# EAGLE board TouScruino-v3 (EAGLE 6.3)

Size 63.5 x 78.74 mm. Coordinates in mm from the lower left corner, seen from the top.
Outline: 63.5,1.27 63.5,6.35 62.23,7.62 58.67,7.62 58.67,60.96 62.23,60.96 63.5,62.23 63.5,67.31 62.23,68.58 58.42,68.58 58.42,78.74 5.08,78.74 5.08,68.58 1.27,68.58 0,67.31 0,62.23 1.27,60.96 5.08,60.96 5.08,7.62 1.27,7.62 0,6.35 0,1.27 1.27,0 62.23,0 63.5,1.27
Copper layers (1*16): Top 0.035mm / dielectric 1.5mm / Bottom 0.035mm
Design rules "default": minimum track width 10mil, minimum drill 24mil, track to track 8mil, track to pad 8mil, pad to pad 8mil, via to via 8mil, smd to smd 8mil, copper to edge 40mil, drill to drill 8mil, minimum pad ring 10mil, minimum via ring 8mil, stop-mask expansion 4mil, vias tented up to drill 0mil, thermal gap 10mil
Net classes: 0 default: width 0.203 mm; 1 vcc: width 0.254 mm
Holes 3.2 mm at 2.54,64.77 60.96,64.77 2.54,3.81 60.96,3.81

## Footprints (pad centres in the part's own frame; a part is rotated, then mirrored left to right if it is on the bottom)
0805 = smd 0.8 x 1.2: 1 -0.9,0; 2 0.9,0
0603-CAP = smd 1.1 x 1: 1 -0.85,0; 2 0.85,0
EIA3216 = smd 1.4 x 1.6: A 1.4,0; C -1.4,0
1X20 = drill 1.016 pad 1.88 square: 1 0,0 | drill 1.016 pad 1.88: 2 2.54,0; 3 5.08,0; 4 7.62,0; 5 10.16,0; 6 12.7,0; 7 15.24,0; 8 17.78,0; 9 20.32,0; 10 22.86,0; 11 25.4,0; 12 27.94,0; 13 30.48,0; 14 33.02,0; 15 35.56,0; 16 38.1,0; 17 40.64,0; 18 43.18,0; 19 45.72,0; 20 48.26,0
JST-2-SMD = smd 1 x 4.6: 1 -1,-3.7; 2 1,-3.7 | smd 1.6 x 3.4: NC1 -3.4,1.5; NC2 3.4,1.5
1X02 = drill 1.016 pad 1.88: 1 0,0; 2 2.54,0
1X3_LONGPAD = drill 1.016 pad 1.245 long: 1 0,0; 2 -2.54,0; 3 -5.08,0
LED = smd 0.8 x 1.2: A -0.9,0; C 0.9,0 | drill 1.016 pad 1.88: A1 -1.27,-1.905; C1 1.27,-1.905
LED-0805 = smd 0.8 x 1.2: 1 -0.9,0; 2 0.9,0
RESONATOR-SMD = smd 0.7 x 1.7: 1 -1.2,0; 2 0,0; 3 1.2,0
SOT23-3 = smd 0.8 x 0.9: 1 -0.95,-1; 2 0.95,-1; 3 0,1.1
CRYSTAL_5X3.2 = smd 1.7 x 2: 1 2.1,0; 2 -2.1,0
TACTILE_SWITCH_SMD = smd 1.524 x 0.762: 1 -2.54,1.905; 2 2.54,1.905; 3 -2.54,-1.905; 4 2.54,-1.905
SJ_2WAYS_1-2_S = smd 0.635 x 1.27: 1 0.508,0; 2 -0.508,0; 3 -1.524,0
SJ_2S-NO = smd 0.635 x 1.27: 1 -0.45,0; 2 0.45,0
MICRO-SD-SOCKET-PP = smd 0.8 x 1.5: 1 -8.94,10.7; 2 -7.84,10.3; 3 -6.74,10.7; 4 -5.64,10.9; 5 -4.54,10.7; 6 -3.44,10.9; 7 -2.34,10.7; 8 -1.24,10.7 | smd 1.8 x 1.4: CD1 -2.05,0.4; CD2 -7.75,0.4 | smd 1.4 x 1.9: GND1 -13.6,14.55; GND3 -0.45,13.55
PJ28004C = smd 0.55 x 3: 1 7,26.5; 2 8,26.5; 3 9,26.5; 4 10,26.5; 5 11,26.5; 6 12,26.5; 7 13,26.5; 8 14,26.5; 9 15,26.5; 10 16,26.5; 11 17,26.5; 12 18,26.5; 13 19,26.5; 14 20,26.5; 15 21,26.5; 16 22,26.5; 17 23,26.5; 18 24,26.5; 19 25,26.5; 20 26,26.5; 21 27,26.5; 22 28,26.5; 23 29,26.5; 24 30,26.5; 25 31,26.5; 26 32,26.5; 27 33,26.5; 28 34,26.5; 29 35,26.5; 30 36,26.5; 31 37,26.5; 32 38,26.5; 33 39,26.5; 34 40,26.5; 35 41,26.5; 36 42,26.5; 37 43,26.5
ARDUINO_SHIELD = drill 1.016 pad 1.88: 3.3V 33.02,50.8; 5V 30.48,50.8; A0 17.78,50.8; A1 15.24,50.8; A2 12.7,50.8; A3 10.16,50.8; A4 7.62,50.8; A5 5.08,50.8; AREF 44.45,2.54; D2 10.16,2.54; D3 12.7,2.54; D4 15.24,2.54; D5 17.78,2.54; D6 20.32,2.54; D7 22.86,2.54; D8 26.67,2.54; D9 29.21,2.54; D10 31.75,2.54; D11 34.29,2.54; D12 36.83,2.54; D13 39.37,2.54; GND@0 27.94,50.8; GND@1 25.4,50.8; GND@2 41.91,2.54; RES 35.56,50.8; RX 5.08,2.54; TX 7.62,2.54; VIN 22.86,50.8
SOT23-5 = smd 0.55 x 1.2: 1 -0.95,-1.3; 2 0,-1.3; 3 0.95,-1.3; 4 0.95,1.3; 5 -0.95,1.3
SOT223 = smd 1.219 x 2.235: 1 -2.311,-3.099; 2 0,-3.099; 3 2.311,-3.099 | smd 3.6 x 2.2: 4 0,3.099
SSOP20 = smd 0.4 x 1.5: 1 -2.925,-3.625; 2 -2.275,-3.625; 3 -1.625,-3.625; 4 -0.975,-3.625; 5 -0.325,-3.625; 6 0.325,-3.625; 7 0.975,-3.625; 8 1.625,-3.625; 9 2.275,-3.625; 10 2.925,-3.625; 11 2.925,3.625; 12 2.275,3.625; 13 1.625,3.625; 14 0.975,3.625; 15 0.325,3.625; 16 -0.325,3.625; 17 -0.975,3.625; 18 -1.625,3.625; 19 -2.275,3.625; 20 -2.925,3.625
TQFP100 = smd 1.5 x 0.35: 1 -8,6; 2 -8,5.5; 3 -8,5; 4 -8,4.5; 5 -8,4; 6 -8,3.5; 7 -8,3; 8 -8,2.5; 9 -8,2; 10 -8,1.5; 11 -8,1; 12 -8,0.5; 13 -8,0; 14 -8,-0.5; 15 -8,-1; 16 -8,-1.5; 17 -8,-2; 18 -8,-2.5; 19 -8,-3; 20 -8,-3.5; 21 -8,-4; 22 -8,-4.5; 23 -8,-5; 24 -8,-5.5; 25 -8,-6; 51 8,-6; 52 8,-5.5; 53 8,-5; 54 8,-4.5; 55 8,-4; 56 8,-3.5; 57 8,-3; 58 8,-2.5; 59 8,-2; 60 8,-1.5; 61 8,-1; 62 8,-0.5; 63 8,0; 64 8,0.5; 65 8,1; 66 8,1.5; 67 8,2; 68 8,2.5; 69 8,3; 70 8,3.5; 71 8,4; 72 8,4.5; 73 8,5; 74 8,5.5; 75 8,6 | smd 0.35 x 1.5: 26 -6,-8; 27 -5.5,-8; 28 -5,-8; 29 -4.5,-8; 30 -4,-8; 31 -3.5,-8; 32 -3,-8; 33 -2.5,-8; 34 -2,-8; 35 -1.5,-8; 36 -1,-8; 37 -0.5,-8; 38 0,-8; 39 0.5,-8; 40 1,-8; 41 1.5,-8; 42 2,-8; 43 2.5,-8; 44 3,-8; 45 3.5,-8; 46 4,-8; 47 4.5,-8; 48 5,-8; 49 5.5,-8; 50 6,-8; 76 6,8; 77 5.5,8; 78 5,8; 79 4.5,8; 80 4,8; 81 3.5,8; 82 3,8; 83 2.5,8; 84 2,8; 85 1.5,8; 86 1,8; 87 0.5,8; 88 0,8; 89 -0.5,8; 90 -1,8; 91 -1.5,8; 92 -2,8; 93 -2.5,8; 94 -3,8; 95 -3.5,8; 96 -4,8; 97 -4.5,8; 98 -5,8; 99 -5.5,8; 100 -6,8
USB-MINIB = smd 2.5 x 0.5: D+ 2.5,0; D- 2.5,0.8; GND 2.5,-1.6; ID 2.5,-0.8; VBUS 2.5,1.6 | smd 2.5 x 2: MTN1 -3,4.5; MTN2 2.5,4.5; MTN3 -3,-4.5; MTN4 2.5,-4.5 | hole 0.9: 0,2.2; 0,-2.2

## Placement (x,y rotation side)
C1  0.1uF  [0805]  28.89,60.96 180 top
C2  18pF  [0603-CAP]  18.1,42.55 0 top
C4  10uF  [EIA3216]  38.73,21.91 90 top
C5  10uF  [EIA3216]  31.75,25.72 180 top
C6  0.1uF  [0805]  27.3,20.64 270 top
C7  4.7uF  [0805]  17.46,20.64 270 top
C8  4.7uF  [0805]  45.72,16.51 180 top
C9  18pF  [0603-CAP]  33.97,58.1 0 top
C10  18pF  [0603-CAP]  17.14,57.47 180 top
C11  18pF  [0603-CAP]  19.05,52.07 0 top
JP1  M20  [1X20]  1.91,-8.26 0 top  (outside the outline)
JP2  BAT  [JST-2-SMD]  45.72,7.62 180 top
JP3  I2C  [1X02]  55.88,10.16 90 top
JP4  I2C  [1X02]  7.62,21.59 270 top
JP5  SWITCH  [1X3_LONGPAD]  7.62,10.16 270 bottom
LED1  Amber  [LED]  53.02,3.17 180 top
LED2  Red  [LED-0805]  46.04,37.78 270 top
Q1  8MHz  [RESONATOR-SMD]  24.13,56.36 180 top
Q2  MMBT2222A  [SOT23-3]  18.1,33.02 180 top
Q3  8MHz  [CRYSTAL_5X3.2]  22.86,60.96 180 top
Q4  8MHz  [CRYSTAL_5X3.2]  17.78,48.26 0 top
R1  2K  [0805]  19.05,24.13 0 top
R2  10k  [0805]  13.65,45.09 90 top
R3  10K  [0805]  45.72,22.7 180 top
R4  20k  [0805]  37.15,58.42 90 top
R5  1K  [0805]  46.04,45.72 0 top
R6  22  [0805]  22.54,25.08 90 top
R7  22  [0805]  25.72,25.08 270 top
R8  10K  [0805]  20,37.15 270 top
S1  [TACTILE_SWITCH_SMD]  53.66,60.64 0 top
S2  [TACTILE_SWITCH_SMD]  13.34,63.18 90 top
SJ1  SJ_2WAYS_1-2  [SJ_2WAYS_1-2_S]  16.83,38.1 90 top
SJ3  [SJ_2S-NO]  11.11,19.53 180 top
U1  uSD-SOCKET  [MICRO-SD-SOCKET-PP]  11.43,16.19 180 top
U2  PJ28004C  [PJ28004C]  57.15,0 0 bottom
U3  ARDUINO_SHIELD  [ARDUINO_SHIELD]  58.42,59.69 270 bottom
U4  MCP73831  [SOT23-5]  45.72,19.05 270 top
U5  MIC5209-3.3YS  [SOT223]  33.02,18.1 180 top
U$3  OSHW-LOGOM  [OSHW-LOGO-M]  28.26,65.41 0 top
U$4  AR1020  [SSOP20]  43.5,58.74 0 top
U$5  OSHW-LOGOM  [OSHW-LOGO-M]  28.26,65.41 0 top
U$6  ATSAM3S_C  [TQFP100]  32.38,41.59 180 top
X1  USBSMD  [USB-MINIB]  33.02,6.03 90 top

## Library data of the parts
C1 C2 C4-C11 JP1 JP2 Q1 Q2 R1-R8 S1 S2 SJ3 U1 U4 U$3 U$5 X1 = SparkFun
JP3-JP5 LED1 LED2 Q3 Q4 SJ1 U2 U3 U5 U$4 U$6 = wibauxl

## Nets
3.3V: C1.2 C5.A C6.1 R2.2 S2.1 SJ1.3 SJ3.1 U1.4 U2.6 U2.16 U2.32 U2.33 U3.3.3V U5.3 U$4.1 U$4.2 U$6.10 U$6.27 U$6.50 U$6.69 U$6.91 U$6.98
A0: U$6.78
A1: U2.8 U$6.80
A2: U$6.82
A3: U$6.84
A4: U$6.86
A5: U$6.90
A6: U$6.92
A7: U$6.94
A8: U$6.13
A9: U$6.17
A10: U$6.54
A11: U$6.4
A12: U$6.6
A13: U$6.8
A14: U$6.14
A15: U$6.18
A16: U$6.24
A17: U$6.74
A18: U$6.72
A19: U$6.22
A21: U$6.73
A22: U$6.75
A.A0: U3.A0 U$6.12
A.A1: U3.A1 U$6.3
A.A2: U3.A2 U$6.5
A.A3: U3.A3 U$6.7
A.A4: U3.A4 U$6.9
A.A5: U3.A5 U$6.23
A.AREF: U3.AREF U$6.1
A.D0/RX0: U3.RX U$6.15
A.D1/TX0: U3.TX U$6.20
A.D2/RX1: U3.D2 U$6.46
A.D3/TX1: U3.D3 U$6.44
A.D4: U3.D4 U$6.34
A.D5: U3.D5 U$6.21
A.D6: U3.D6 U$6.30
A.D7/DAC0: U3.D7 U$6.93
A.D8/DAC1: U3.D8 U$6.99
A.D9: U3.D9 U$6.28
A.D10: U3.D10 U$6.42
A.D11/MISO: U3.D11 U$4.9 U$6.41
A.D12/MOSI: U3.D12 U$4.13 U$6.33
A.D13: U3.D13
A.D13/SCK: R5.2 U$4.11 U$6.31
A.SCL: JP3.1 U$6.55
A.SDA: JP3.2 U$6.66
BL: R8.2 SJ1.2
D0: U2.1 U$6.25
D1: U2.2 U$6.47
D2: U2.3 U$6.43
D3: U2.4 U$6.40
D4: U2.22 U$6.37
D5: U2.35 U$6.35
D5/PWM1: SJ1.1
D6: U2.36 U$6.32
D7: U2.37 U$6.29
GND [vcc]: C1.1 C2.2 C4.C C5.C C6.2 C7.1 C8.1 C9.2 C10.2 C11.2 JP2.1 LED2.2 Q1.2 Q2.2 R1.1 S1.1 U1.6 U1.GND1 U1.GND3 U2.5 U2.34 U3.GND@0 U3.GND@1 U3.GND@2 U4.2 U5.2 U5.4 U$4.3 U$4.4 U$4.7 U$4.14 U$4.17 U$4.20 U$6.2 U$6.26 U$6.45 U$6.61 U$6.70 U$6.77 U$6.95 X1.GND
IOREF: JP4.1 SJ3.2
LCD.BL: U$6.67
LCD_CS: U2.7 U$6.19
N$1: C9.1 Q1.1 Q3.2 U$6.97
N$2: C10.1 Q1.3 Q3.1 U$6.96
N$4: Q2.1 R8.1
N$5: LED2.1 R5.1
N$7: Q2.3 R6.2 R7.2
N$8: LED1.C1 R3.1
N$9: R2.1 S1.3 U$6.60
N$10: U$6.11 U$6.16 U$6.36 U$6.56 U$6.85 U$6.100
N$11: R4.2 U$4.5
N$12: R3.2 U4.1
N$13: R1.2 U4.5
N$14: S2.3 U$6.87
N$25: R7.1 U2.19 U2.20
N$32: R6.1 U2.17 U2.18
N$45: C2.1 Q4.1 U$6.49
N$46: C11.1 Q4.2 U$6.48
PD_CS: U$6.71
RD: U2.10 U$6.68
RES: U3.RES
SD.CD: U1.CD1 U$6.38
SD.CLK: U1.5 U$6.63
SD.CMD: U1.3 U$6.59
SD.D0: U1.7 U$6.64
SD.D1: U1.8 U$6.81
SD.D2: U1.1 U$6.39
SD.D3: U1.2 U$6.57
TCK: U$6.83
TDI: U$6.51
TDO: U$6.76
TMS: U$6.79
TS.CS: U$4.8 U$6.53
TS.IRQ: U$4.6 U$6.52
USB.D+: U$6.89 X1.D+
USB.D-: U$6.88 X1.D-
V+: C4.A JP5.2 U5.1
VBAT: C8.2 JP2.2 JP5.1 U4.3
VUSB: C7.2 JP5.3 LED1.A1 U3.5V U4.4 X1.VBUS
WR: U2.9 U$6.58
X+: U2.12 U$4.18
X-: U2.14 U$4.19
Y+: U2.13 U$4.15
Y-: R4.1 U2.15 U$4.16

## Tracks (layer width: path | path; a pad name or v marks a point on that pad's centre or on a via)
3.3V  (21 unrouted)
A1  (1 unrouted)
A.A0  (1 unrouted)
A.A1  (1 unrouted)
A.A2  (1 unrouted)
A.A3  (1 unrouted)
A.A4  (1 unrouted)
A.A5  (1 unrouted)
A.AREF  (1 unrouted)
A.D0/RX0  (1 unrouted)
A.D1/TX0  (1 unrouted)
A.D2/RX1  (1 unrouted)
A.D3/TX1  (1 unrouted)
A.D4  (1 unrouted)
A.D5  (1 unrouted)
A.D6  (1 unrouted)
A.D7/DAC0  (1 unrouted)
A.D8/DAC1  (1 unrouted)
A.D9  (1 unrouted)
A.D10  (1 unrouted)
A.D11/MISO  (2 unrouted)
A.D12/MOSI  (2 unrouted)
A.D13/SCK  (2 unrouted)
A.SCL  (1 unrouted)
A.SDA  (1 unrouted)
BL  (1 unrouted)
D0  (1 unrouted)
D1  (1 unrouted)
D2  (1 unrouted)
D3  (1 unrouted)
D4  (1 unrouted)
D5  (1 unrouted)
D6  (1 unrouted)
D7  (1 unrouted)
GND  (40 unrouted)
IOREF  (1 unrouted)
LCD_CS  (1 unrouted)
N$1  (3 unrouted)
N$2  (3 unrouted)
N$4  (1 unrouted)
N$5  (1 unrouted)
N$7  (2 unrouted)
N$8  (1 unrouted)
N$9  (2 unrouted)
N$10  (5 unrouted)
N$11  (1 unrouted)
N$12  (1 unrouted)
N$13  (1 unrouted)
N$14  (1 unrouted)
N$25  (2 unrouted)
N$32  (2 unrouted)
N$45  (2 unrouted)
N$46  (2 unrouted)
RD  (1 unrouted)
SD.CD  (1 unrouted)
SD.CLK  (1 unrouted)
SD.CMD  (1 unrouted)
SD.D0  (1 unrouted)
SD.D1  (1 unrouted)
SD.D2  (1 unrouted)
SD.D3  (1 unrouted)
TS.CS  (1 unrouted)
TS.IRQ  (1 unrouted)
USB.D+  (1 unrouted)
USB.D-  (1 unrouted)
V+  (2 unrouted)
VBAT  (3 unrouted)
VUSB  (5 unrouted)
WR  (1 unrouted)
X+  (1 unrouted)
X-  (1 unrouted)
Y+  (1 unrouted)
Y-  (2 unrouted)

## Text on the board
tPlace: TouScruino | v3 | RESET | RX | A5 | TX | A4 | RX1/D2 | A3 | TX1/D3 | A2 | D4 | A1 | ~D5 | A0 | ~D6 | D7 | GND | D8 | GND | ~D9 | 5V | BACK | LIGHT | ~D10 | 3.3V | MOSI | D11 | MISO | RESET | D12 | IOREF | SCK | D13 | D13 | GND | SDA | V+ | SCL | BAT | CHARGE